# EAGLE board controller (EAGLE 7.0.0)
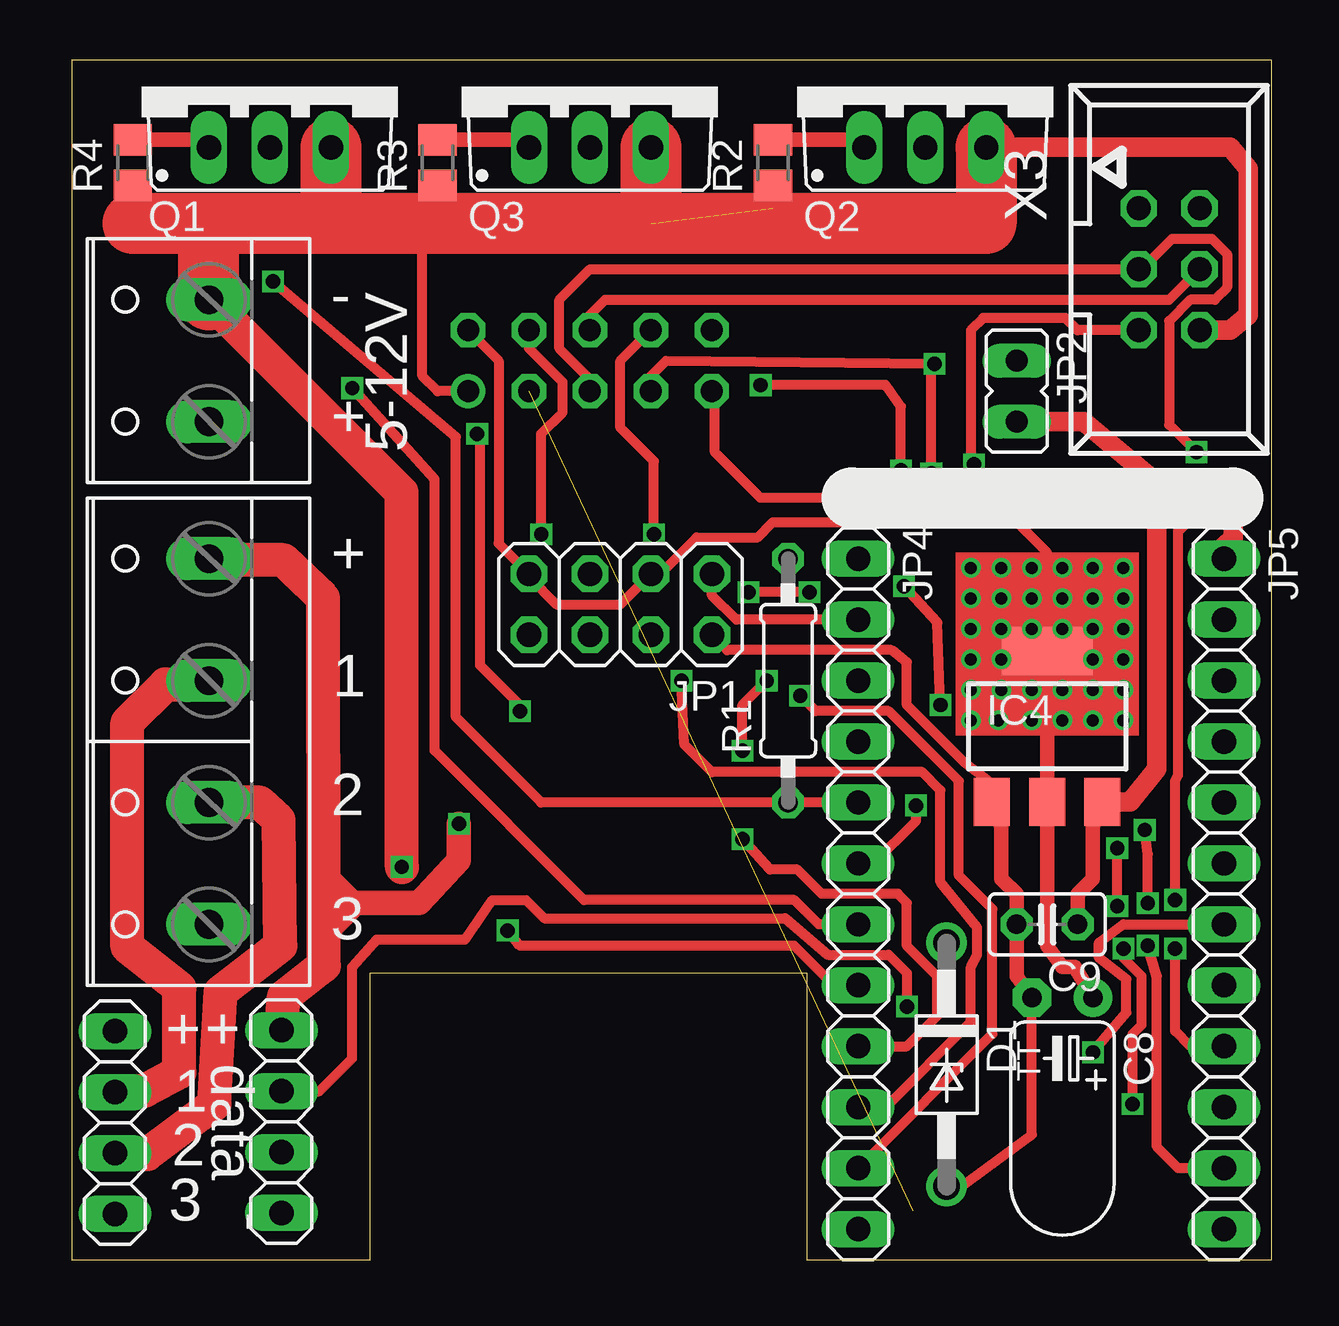
[diagram p0: board, top side]
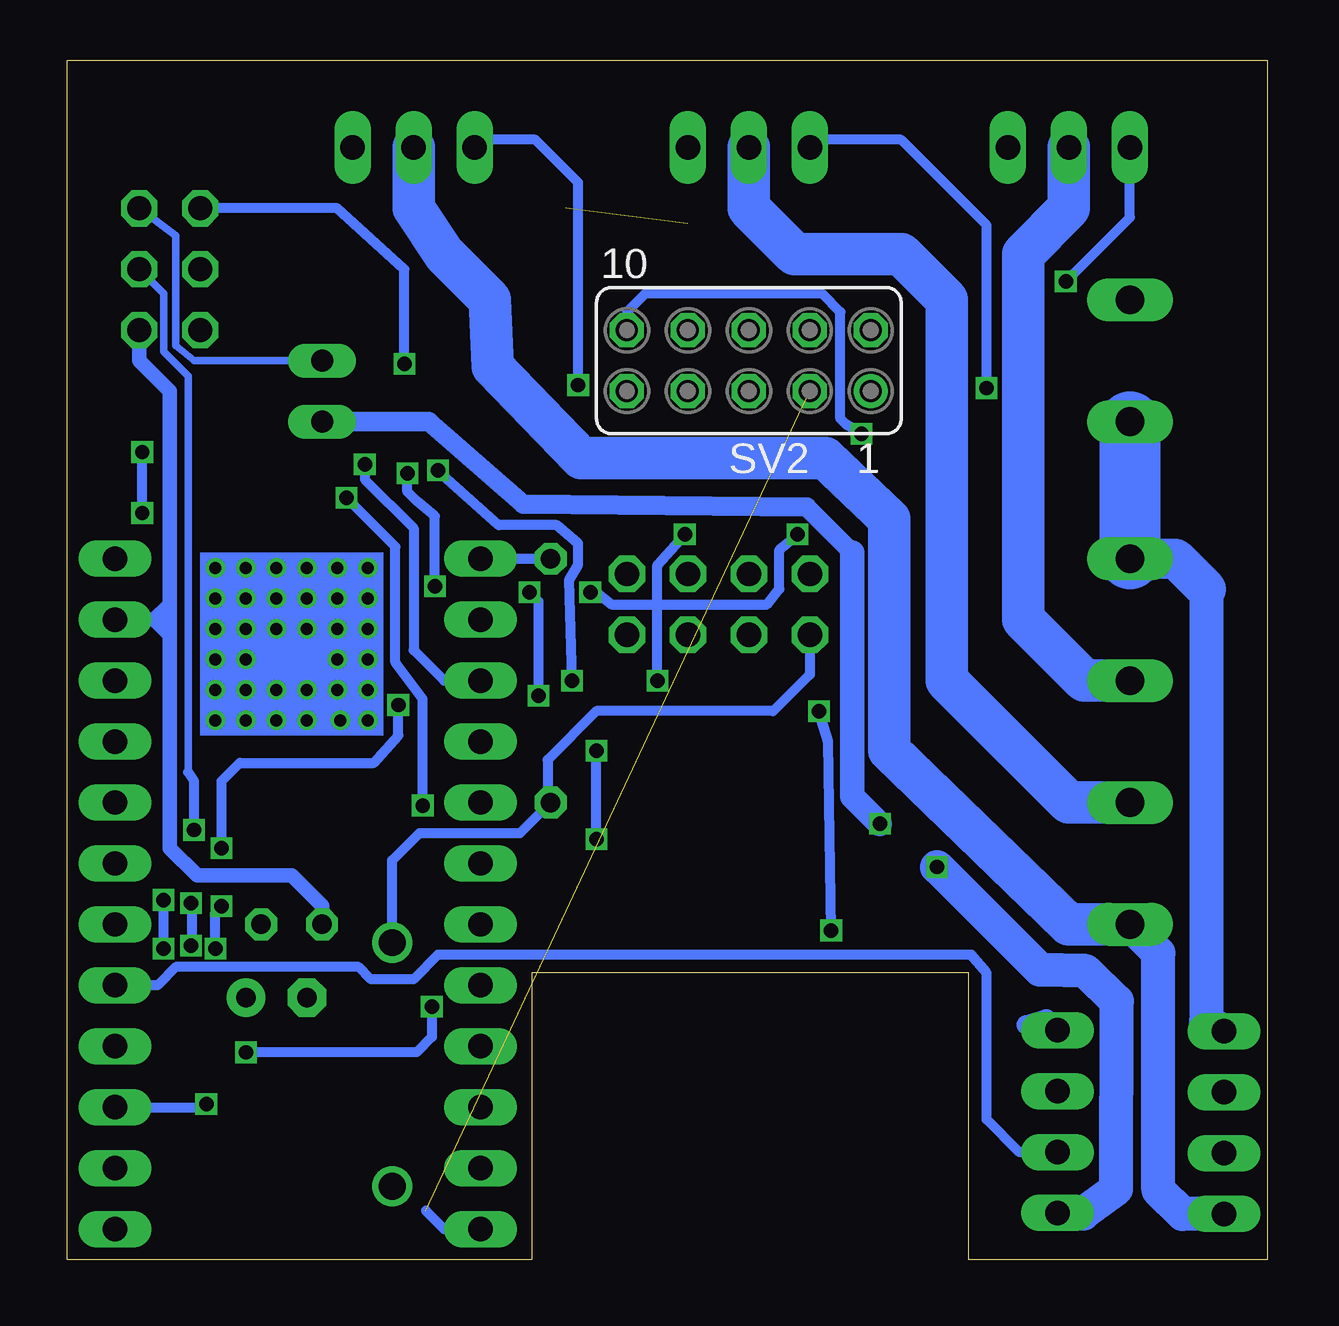
[diagram p1: board, bottom side, seen from below]

Size 50 x 50 mm. Coordinates in mm from the lower left corner, seen from the top.
Outline: 0,0 12.43,0 12.43,11.95 30.63,11.95 30.63,0 50,0 50,50 0,50 0,0
Copper layers (1*16): Top 0.035mm / dielectric 1.5mm / Bottom 0.035mm
Design rules "SeeedStudio_2layer_DRU_no_angle_20140221": minimum track width 6mil, minimum drill 12mil, track to track 6mil, track to pad 6mil, pad to pad 6mil, via to via 6mil, smd to smd 0mil, copper to edge 10mil, drill to drill 10mil, minimum pad ring 10mil, minimum via ring 6mil, stop-mask expansion 2mil, vias tented up to drill 100mil, thermal gap 10mil
Net classes: 0 default: clearance 0.205 mm

## Footprints (pad centres in the part's own frame; a part is rotated, then mirrored left to right if it is on the bottom)
TT2D4L = drill 0.813 pad 1.6: + -1.27,0 | drill 0.813 pad 1.6 octagon: - 1.27,0
C025-025X050 = drill 0.813 octagon: 1 -1.27,0; 2 1.27,0
DO41Z10 = drill 1.118: A 5.08,0; C -5.08,0
SOT223 = smd 1.5 x 2: 1 -2.3,-3.15; 2 0,-3.15; 3 2.3,-3.15 | smd 3.8 x 2: 4 0,3.15
2X04 = drill 1.016 octagon: 1 -3.81,-1.27; 2 -3.81,1.27; 3 -1.27,-1.27; 4 -1.27,1.27; 5 1.27,-1.27; 6 1.27,1.27; 7 3.81,-1.27; 8 3.81,1.27
JP1 = drill 0.914 long: 1 0,-1.27; 2 0,1.27
1X04 = drill 1.016 long: 1 -3.81,0; 2 -1.27,0; 3 1.27,0; 4 3.81,0
1X12 = drill 1.016 long: 1 -13.97,0; 2 -11.43,0; 3 -8.89,0; 4 -6.35,0; 5 -3.81,0; 6 -1.27,0; 7 1.27,0; 8 3.81,0; 9 6.35,0; 10 8.89,0; 11 11.43,0; 12 13.97,0
TO220BV = drill 1.016 long: D 0,-2.54; G -2.54,-2.54; S 2.54,-2.54
0207/10 = drill 0.813 octagon: 1 -5.08,0; 2 5.08,0
M0805 = smd 1.3 x 1.6: 1 -0.95,0; 2 0.95,0
FE05-2 = drill 0.914: 1 -5.08,1.27 | drill 0.914 octagon: 2 -5.08,-1.27; 3 -2.54,1.27; 4 -2.54,-1.27; 5 0,1.27; 6 0,-1.27; 7 2.54,1.27; 8 2.54,-1.27; 9 5.08,1.27; 10 5.08,-1.27
057-006-1 = drill 1 octagon: 1 -2.54,-1.27; 2 -2.54,1.27; 3 0,-1.27; 4 0,1.27; 5 2.54,-1.27; 6 2.54,1.27
W237-4P = drill 1.194 long: 1 -7.62,-0.635; 2 -2.54,-0.635; 3 2.54,-0.635; 4 7.62,-0.635
W237-132 = drill 1.194 long: 1 -2.54,-0.635; 2 2.54,-0.635

## Placement (x,y rotation side)
C8  10u  [TT2D4L]  41.27,10.92 180 top
C9  100n  [C025-025X050]  40.64,13.97 180 top
D1  1N4728  [DO41Z10]  36.45,8.13 270 top
IC4  AP1117E33G  [SOT223]  40.64,22.23 0 top
JP1  [2X04]  22.86,27.3 180 top
JP2  [JP1]  39.37,36.2 180 top
JP3  [1X04]  1.79,5.71 90 top
JP4  [1X12]  32.77,15.24 270 top
JP5  [1X12]  48.01,15.24 270 top
JP6  [1X04]  8.73,5.75 270 top
Q1  IRF540  [TO220BV]  8.26,48.9 0 top
Q2  IRF540  [TO220BV]  35.56,48.9 0 top
Q3  IRF540  [TO220BV]  21.59,48.9 0 top
R1  100  [0207/10]  29.84,24.13 90 top
R2  1k  [M0805]  29.21,45.72 90 top
R3  1k  [M0805]  15.24,45.72 90 top
R4  1k  [M0805]  2.54,45.72 90 top
SV2  [FE05-2]  21.59,37.47 180 bottom
X3  057-006-1  [057-006-1]  45.72,41.27 270 top
X4  [W237-4P]  5.08,21.59 90 top
X5  [W237-132]  5.08,37.47 90 top

## Library data of the parts
C8 C9 R1-R4 = rcl
D1 = diode
IC4 = v-reg
JP1 JP3-JP6 = pinhead
JP2 = jumper
Q1-Q3 = transistor-power
SV2 = con-lsta; OC_FARNELL: unknown; OC_NEWARK: unknown
X3 = con-panduit; OC_FARNELL: unknown; OC_NEWARK: unknown
X4 X5 = con-wago-508; OC_FARNELL: unknown; OC_NEWARK: unknown

## Nets
+3V3: C8.+ IC4.4 JP1.3 JP1.7 SV2.2
GND: C8.- C9.2 D1.A IC4.1 JP1.2 JP5.2 JP6.4 Q1.S Q2.S Q3.S R2.1 R3.1 R4.1 SV2.1 X3.6 X5.2
N$1: JP4.1 R1.2
N$2: JP4.3 X3.5
N$4: JP5.9 SV2.5 X3.3
N$5: JP5.10 SV2.7 X3.1
N$6: D1.C JP1.8 R1.1
N$7: JP4.9 Q2.G R2.2
N$8: JP1.1 JP4.2
N$9: JP3.1 Q2.D X4.1
N$10: JP3.2 Q3.D X4.2
N$11: JP3.3 Q1.D X4.3
N$15: JP5.11 SV2.6 X3.4
N$16: JP4.5 Q1.G R4.2
N$17: JP4.7 Q3.G R3.2
N$19: JP4.12 SV2.3
N$20: JP4.6 SV2.9
N$21: JP4.11 SV2.4
N$22: JP4.10 SV2.8
N$23: JP4.8 SV2.10
N$53: JP2.1 X3.2
N$54: JP5.7 JP6.2
N$55: JP5.8 JP6.3
V+: C9.1 IC4.3 JP2.2 JP3.4 JP5.1 JP6.1 X4.4 X5.1

## Tracks (layer width: path | path; a pad name or v marks a point on that pad's centre or on a via)
+3V3
  Top 0.406: SV2.2 17.78,37.47 17.78,29.84 JP1.7 19.05,28.45 20.19,27.3 22.86,27.3 JP1.3 24.51,28.57 26.04,30.1 28.57,30.1 29.21,30.73 39.37,30.73 40.64,29.46 IC4.4
  Top 0.61: C8.+ 41.78,12.19 41.27,12.19 40.64,13.08 IC4.4
GND  (via drill 0.6)  (1 unrouted)
  Top 0.406: R4.1 2.54,43.18 | R3.1 15.24,43.18 | R2.1 29.21,43.81 | SV2.1 15.24,36.2 14.61,36.83 14.61,43.18 | D1.A 37.08,3.05 40.01,5.21 C8.- | IC4.1 38.33,19.84 37.19,20.73 34.8,23.11 34.8,24.89 34.16,25.4 27.3,25.4 JP1.2
  Top 0.61: C8.- 39.37,11.81 C9.2 39.37,15.24 38.73,15.88 38.73,18.05 IC4.1
  Top 0.813: X3.6 48.26,38.73 49.02,39.37 49.02,45.47 48.26,46.35 Q2.S
  Top 1.422: v13.75,16.36 13.74,31.98 X5.2
  Top 2.54: Q1.S 10.79,43.18 | 10.79,43.18 5.71,43.18 | 5.71,43.18 2.54,43.18 | Q3.S 24.13,43.18 | 24.13,43.18 15.24,43.18 14.61,43.18 10.79,43.18 | Q2.S 38.1,43.18 24.13,43.18 | X5.2 5.71,43.18
  Bottom 0.61: X3.6 46.99,37.47 45.72,36.2 45.72,27.3 | 45.72,27.3 45.72,26.67 | 45.72,26.67 45.72,26.04 | 45.72,26.04 45.72,17.14 44.58,16 40.64,16 39.37,14.73 C9.2 | JP5.2 46.35,26.67 | 46.35,26.67 45.72,26.67 | 45.72,26.04 46.35,26.67 | 45.72,27.3 46.35,26.67
  Bottom 1.422: JP6.4 7.65,1.92 6.29,2.93 6.26,10.77 7.56,12.03 9.45,12.08 v13.75,16.36
N$1
  Bottom 0.406: JP4.1 R1.2
N$2  (via drill 0.6)
  Top 0.406: X3.5 41.91,38.73 41.4,39.24 37.97,39.24 37.47,38.73 37.47,33.27 v37.59,33.15
  Bottom 0.406: v37.59,33.15 37.59,32.51 35.56,30.48 35.56,25.4 34.29,24.13 JP4.3
N$3  (via drill 0.5)
  other vias: 37.47,22.48
N$4  (via drill 0.6)
  Top 0.406: SV2.5 21.59,36.7 20.32,37.97 20.32,40.01 21.59,41.27 X3.3 44.58,41.27 45.85,42.55 47.5,42.55 48.13,41.91 48.13,40.51 47.62,40.01 46.61,40.01 45.72,39.12 45.72,34.8 v46.86,33.66 | JP5.9 46.61,8.89 45.97,9.53 v45.97,12.95 | v45.97,14.99 45.97,19.94 46.1,20.19 46.1,30.35 v46.86,31.11
  Bottom 0.406: v45.97,12.95 v45.97,14.99 | v46.86,31.11 v46.86,33.66
N$5  (via drill 0.6)
  Top 0.406: SV2.7 24.13,36.83 24.77,37.47 v35.94,37.34 35.81,37.34 v35.81,32.77 | v44.2,6.48 44.2,9.4 44.58,9.78 44.58,11.81 43.81,12.57 v43.81,12.95 | v43.56,14.73 v43.56,17.14 | v36.2,23.11 36.07,26.54 v34.67,28.07
  Bottom 0.406: v35.94,37.34 35.94,41.27 38.73,43.81 X3.1 | JP5.10 44.32,6.35 v44.2,6.48 | v43.81,12.95 43.81,14.48 v43.56,14.73 | v43.56,17.14 43.56,19.94 42.8,20.7 37.21,20.7 36.2,21.84 v36.2,23.11 | v34.67,28.07 34.67,30.99 35.43,31.62 35.81,32 v35.81,32.77
N$6
  Bottom 0.406: JP1.8 19.05,24.38 20.57,22.86 27.94,22.86 29.97,20.83 29.97,19.18 R1.1 31.11,17.78 35.31,17.78 36.45,16.64 D1.C
N$7  (via drill 0.6)
  Top 0.406: JP4.9 34.8,8.89 36.07,10.16 36.07,11.81 34.8,13.08 34.8,14.86 34.42,15.24 31.24,15.24 30.23,16.26 29.08,16.26 v27.94,17.53 | v27.94,21.21 27.94,23.11 v28.96,24.13 | v34.54,32.89 34.54,35.56 33.91,36.45 v28.7,36.45
  Top 0.61: R2.2 32.7,46.67 Q2.G
  Bottom 0.406: v27.94,17.53 v27.94,21.21 | v28.96,24.13 29.08,28.32 28.7,28.96 28.7,29.84 29.59,30.61 32,30.61 v34.54,32.89 | v28.7,36.45 28.7,44.89 30.48,46.67 32.7,46.67 Q2.G
N$8
  Top 0.406: JP4.2 27.69,26.67 26.67,27.69 JP1.1
N$9
  Bottom 1.422: JP3.1 3.52,1.9 4.52,2.9 4.52,12.78 X4.1
  Bottom 1.778: X4.1 8.26,13.97 15.75,21.21 15.75,30.86 18.41,33.4 28.57,33.4 32.26,37.21 32.38,40.01 34.29,41.91 35.56,43.81 Q2.D
N$10
  Top 1.422: JP3.2 3.15,4.4 5.95,6.49 6.2,11.15 8.69,13.08 8.62,18.32 7.82,19.05 X4.2
  Bottom 1.778: X4.2 8.26,19.05 13.34,24.13 13.34,40.01 15.24,41.91 19.68,41.91 21.59,43.81 Q3.D
N$11
  Top 1.422: JP3.3 3.05,7.05 4.48,7.82 4.48,11.32 2.32,13.03 2.32,22.38 3.91,23.97 5.55,23.97 X4.3
  Bottom 1.778: X4.3 7.62,24.13 10.16,26.67 10.16,41.91 8.26,43.81 Q1.D
N$12  (via drill 0.5)
  other vias: 37.47,23.75
N$13  (via drill 0.5)
  other vias: 37.47,25.02
N$14  (via drill 0.5)
  other vias: 37.47,26.29
N$15  (via drill 0.6)
  Top 0.406: SV2.6 21.59,39.37 22.23,40.01 45.72,40.01 X3.4 | JP5.11 46.1,3.81 45.21,4.7 45.21,11.81 v44.83,13.08 | v44.83,14.86 44.83,16.89 v44.7,17.91
  Bottom 0.305: 44.96,20.32 44.96,36.83 45.97,37.85 45.97,40.26 X3.4
  Bottom 0.406: v44.83,14.86 44.8,14.46 44.8,13.11 v44.83,13.08 | v44.7,17.91 44.7,19.94 44.96,20.32
N$16  (via drill 0.6)
  Top 0.406: JP4.5 19.56,19.05 16,22.61 16,34.29 v8.38,40.77
  Top 0.61: R4.2 5.4,46.67 Q1.G
  Bottom 0.406: v8.38,40.77 5.71,43.43 Q1.G
N$17  (via drill 0.6)
  Top 0.406: JP4.7 31.11,13.97 30.1,14.99 21.34,14.99 15.11,21.21 15.11,32.51 v11.68,36.32
  Top 0.61: R3.2 18.73,46.67 Q3.G
  Bottom 0.406: v11.68,36.32 11.68,43.11 R3.2 18.73,46.67 Q3.G
N$18  (via drill 0.5)
  other vias: 37.47,27.56
N$19  (1 unrouted)
  Bottom 0.406: JP4.12 34.29,1.27 35.05,2.03
N$20  (via drill 0.6)
  Top 0.406: JP4.6 33.4,16.51 35.18,18.29 v35.18,18.92 | v38.35,31.75 28.7,31.75 26.8,33.66 26.8,36.07 SV2.9
  Bottom 0.406: v35.18,18.92 35.18,23.37 36.32,24.89 36.32,29.72 v38.35,31.75
N$21  (via drill 0.6)
  Top 0.406: JP4.11 38.35,9.4 38.35,14.61 36.96,16 36.96,19.94 34.04,22.86 30.99,22.86 v30.35,23.5 | v30.73,27.81 v28.19,27.81 | v19.56,30.23 19.56,34.42 20.45,35.31 20.45,36.58 19.05,37.97 SV2.4
  Bottom 0.406: v30.35,23.5 30.35,27.43 v30.73,27.81 | v28.19,27.81 27.94,27.81 27.3,27.3 20.83,27.3 20.32,27.94 20.32,29.59 v19.56,30.23
N$22  (via drill 0.6)
  Top 0.406: JP4.10 33.91,6.35 37.47,9.91 37.47,12.19 37.72,12.7 37.72,13.84 36.2,15.75 36.2,19.56 35.43,20.32 26.67,20.32 25.53,21.46 v25.4,24.13 | v24.26,30.23 24.26,33.27 22.86,34.67 22.86,37.47 SV2.8
  Bottom 0.406: v25.4,24.13 25.4,28.96 v24.26,30.23
N$23  (via drill 0.6)
  Top 0.406: JP4.8 31.75,11.43 30.1,13.08 18.67,13.08 v18.16,13.72 | v18.67,22.86 18.67,23.11 17.02,24.77 17.02,34.42 v16.89,34.42
  Bottom 0.406: v18.16,13.72 18.29,21.59 v18.67,22.86 | v16.89,34.42 17.53,34.8 17.78,35.05 17.78,39.5 18.54,40.26 25.91,40.26 26.67,39.5 SV2.10
N$24  (via drill 0.5)
  other vias: 37.47,28.83
N$25  (via drill 0.5)
  other vias: 38.73,28.83
N$26  (via drill 0.5)
  other vias: 40.01,28.83
N$27  (via drill 0.5)
  other vias: 41.27,28.83
N$28  (via drill 0.5)
  other vias: 42.55,28.83
N$29  (via drill 0.5)
  other vias: 43.81,28.83
N$30  (via drill 0.5)
  other vias: 43.81,27.56
N$31  (via drill 0.5)
  other vias: 43.81,26.29
N$32  (via drill 0.5)
  other vias: 43.81,25.02
N$33  (via drill 0.5)
  other vias: 43.81,23.75
N$34  (via drill 0.5)
  other vias: 43.81,22.48
N$35  (via drill 0.5)
  other vias: 42.55,22.48
N$36  (via drill 0.5)
  other vias: 41.27,22.48
N$37  (via drill 0.5)
  other vias: 40.01,22.48
N$38  (via drill 0.5)
  other vias: 38.61,22.48
N$39  (via drill 0.5)
  other vias: 38.73,23.75
N$40  (via drill 0.5)
  other vias: 40.01,23.75
N$41  (via drill 0.5)
  other vias: 41.27,23.75
N$42  (via drill 0.5)
  other vias: 42.55,23.75
N$43  (via drill 0.5)
  other vias: 42.55,25.02
N$44  (via drill 0.5)
  other vias: 42.55,26.29
N$45  (via drill 0.5)
  other vias: 42.55,27.56
N$46  (via drill 0.5)
  other vias: 41.27,27.56
N$47  (via drill 0.5)
  other vias: 41.27,26.29
N$48  (via drill 0.5)
  other vias: 40.01,26.29
N$49  (via drill 0.5)
  other vias: 40.01,27.56
N$50  (via drill 0.5)
  other vias: 38.73,27.56
N$51  (via drill 0.5)
  other vias: 38.73,26.29
N$52  (via drill 0.5)
  other vias: 38.73,25.02
N$53
  Bottom 0.305: X3.2 45.47,42.67 45.47,38.1 44.7,37.47 JP2.1
N$54  (via drill 0.6)
  Top 0.406: JP6.2 10.32,7.02 11.68,8.38 11.68,12.19 12.7,13.34 16.38,13.34 17.53,14.99 18.92,14.99 19.68,14.22 29.72,14.22 31.5,12.7 34.04,12.7 34.8,11.94 v34.8,10.54 | v42.55,8.64 43.94,10.29 43.94,11.68 42.8,12.57 42.8,13.21 43.81,13.97 JP5.7
  Bottom 0.406: v34.8,10.54 34.8,9.27 35.43,8.64 v42.55,8.64
N$55
  Bottom 0.406: JP6.3 10.32,4.48 11.68,5.84 11.68,11.94 12.32,12.7 34.54,12.7 35.56,11.68 37.34,11.68 37.85,12.19 45.47,12.19 46.23,11.43 JP5.8
N$57
  Top 1.016: 11.68,14.86 10.54,16
V+  (via drill 0.6)
  Top 0.61: C9.1 41.91,15.24 42.55,15.88 42.55,18.05 IC4.3
  Top 0.813: IC4.3 44.09,19.07 45.21,20.45 45.21,32.38 | 45.21,32.38 42.16,34.92 JP2.2 | JP5.1 48.01,29.72 48.39,30.1 48.39,31.75 47.75,32.38 45.21,32.38
  Top 1.016: v16.13,18.16 16.13,16.64 14.48,14.86 11.81,14.86 | 11.81,14.86 10.5,14.86 10.5,14.61 | 11.81,14.86 10.54,13.59
  Top 1.422: JP6.1 8.84,10.95 10.5,12.26 10.5,14.61 10.47,27.57 8.82,29.15 5.78,29.15 X4.4
  Bottom 0.813: JP2.2 34.92,34.92 30.99,31.5 19.18,31.37 17.27,29.46 | 10.03,9.78 9.2,10.03 JP6.1
  Bottom 1.016: 17.27,29.46 17.27,19.3 v16.13,18.16
  Bottom 1.422: 2.54,27.94 2.54,9.96 JP3.4
  Bottom 1.676: X4.4 3.81,29.21 2.54,27.94
  Bottom 2.54: X5.1 X4.4
(copper drawn outside any net)
  shapes: Bottom area x1, Top area x1

## Text on the board
tNames: - | + | 5-12V | + | 1 | 2 | 3 | + | + | data | 1 | 2 | 3 | -